# Altium PCB TWO_WHEEL.PcbDoc
Units mil, origin at the board's own origin, x right, y up, seen from the top; angles counter-clockwise.
Board outline 3115 x 2630 mil, 2 copper layers (Top Layer, Bottom Layer); 22 components, 43 nets, 150 pads, 6 vias.
Unrouted connection lines stored in the file: 1.
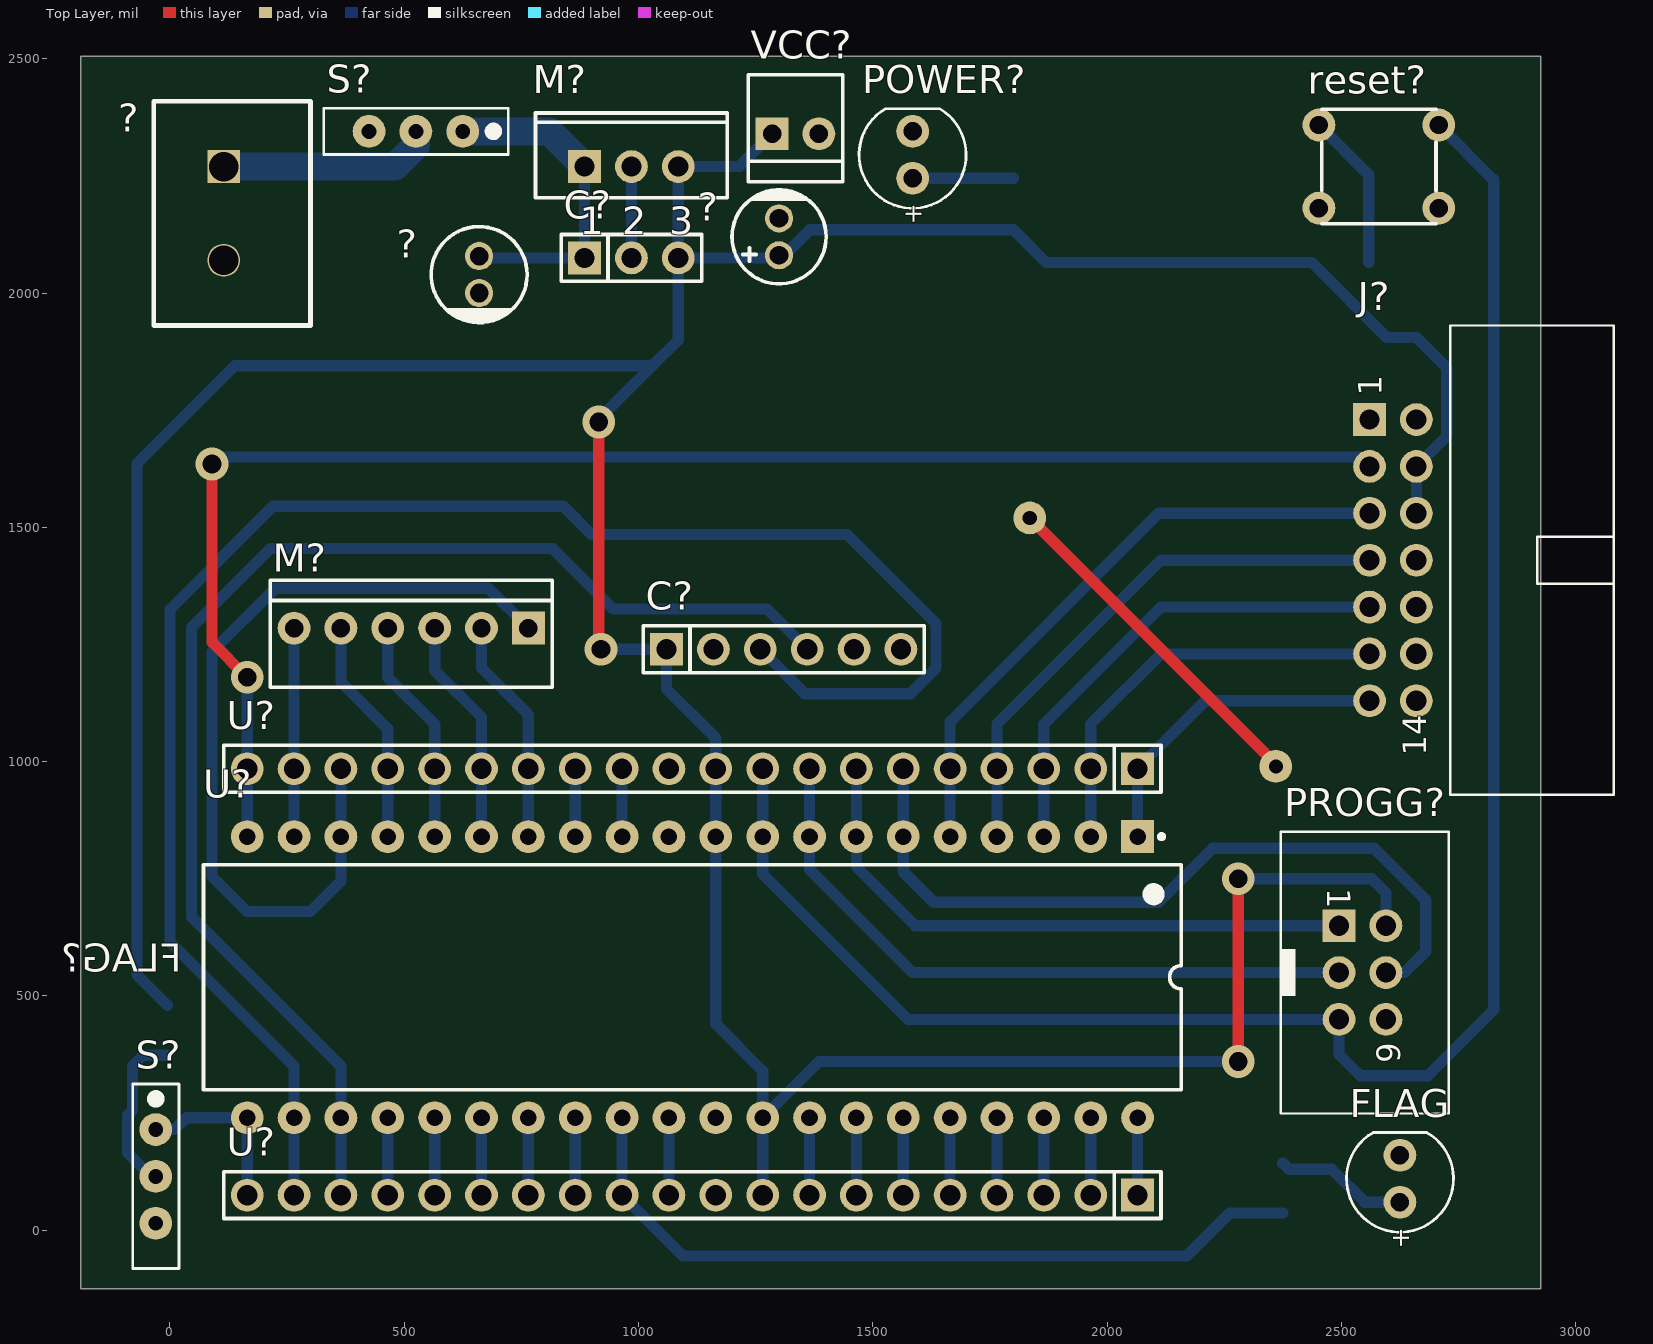
[diagram p0: Top Layer view]
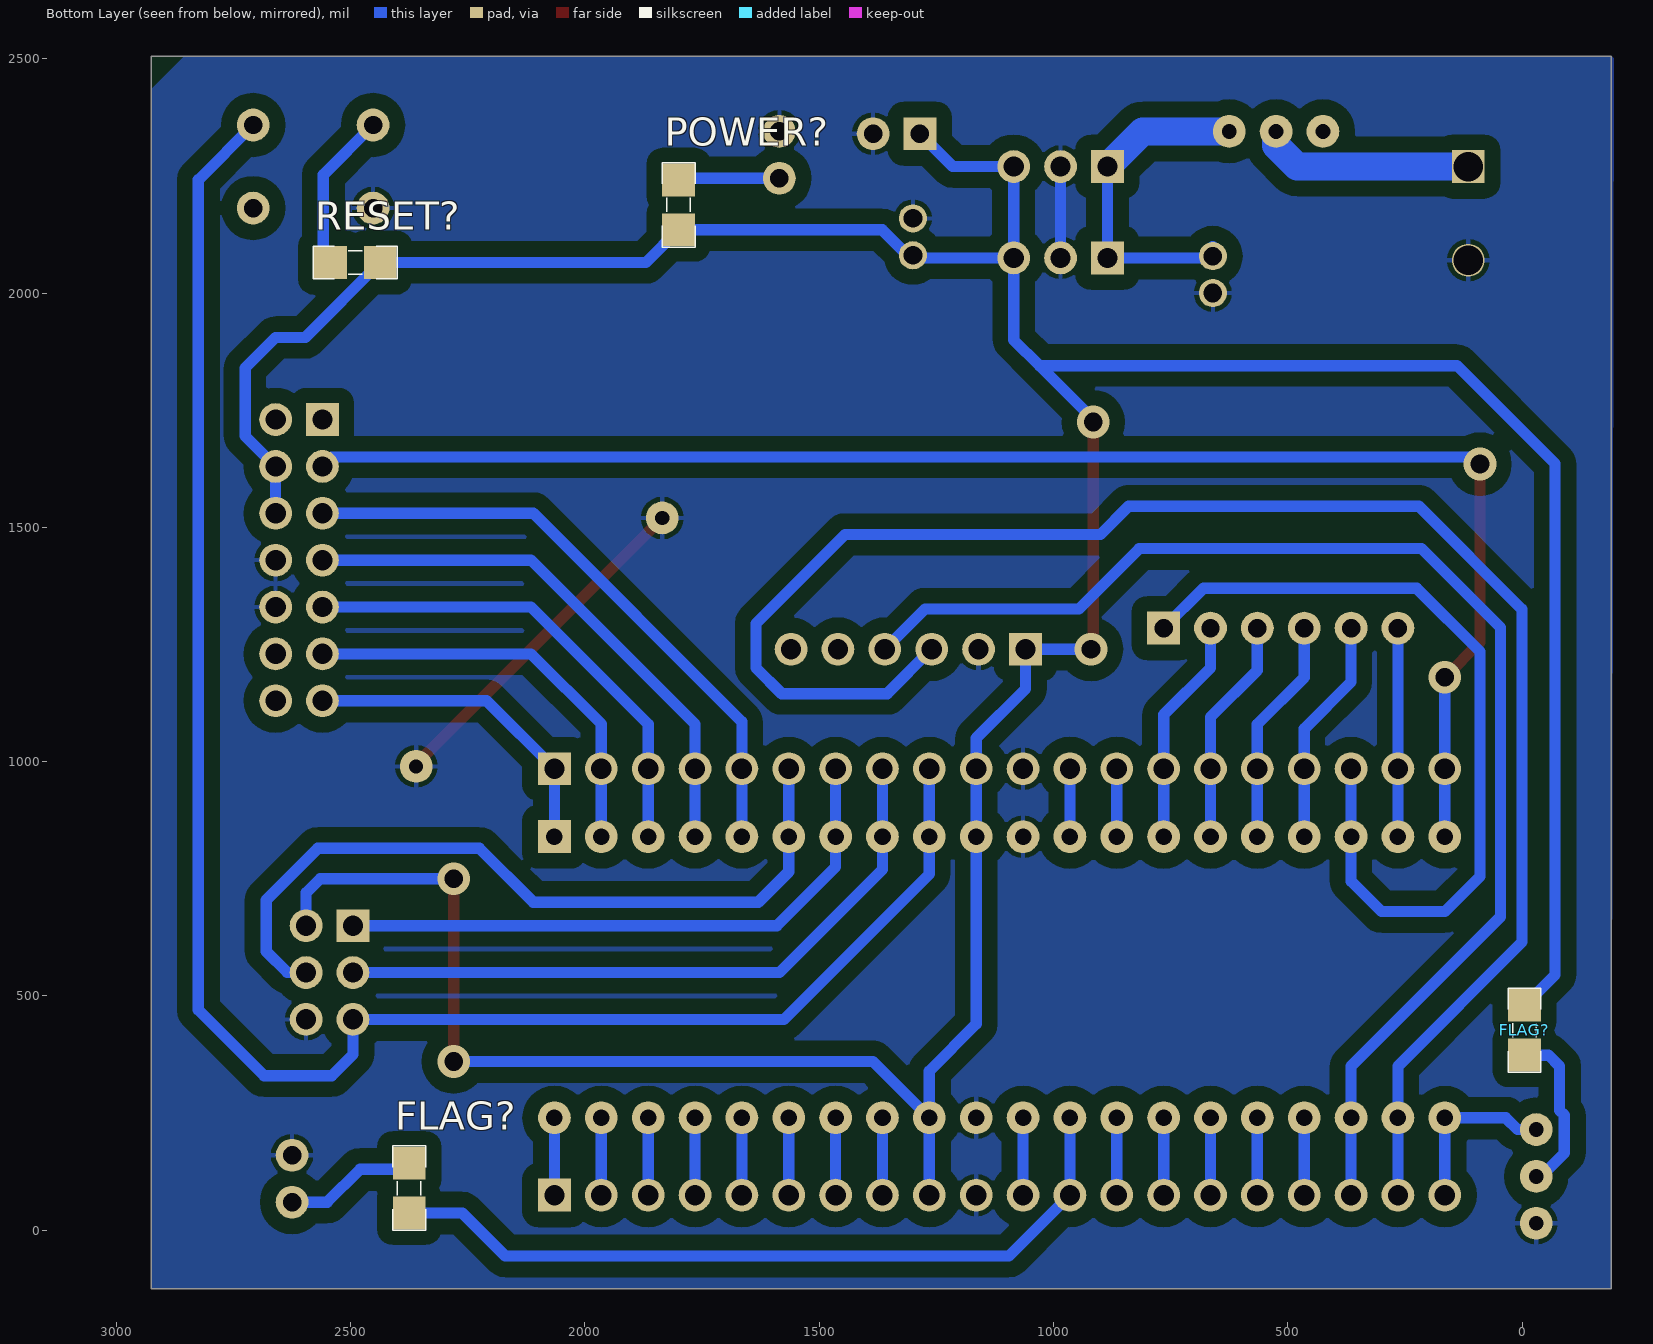
[diagram p1: Bottom Layer view, seen from below]
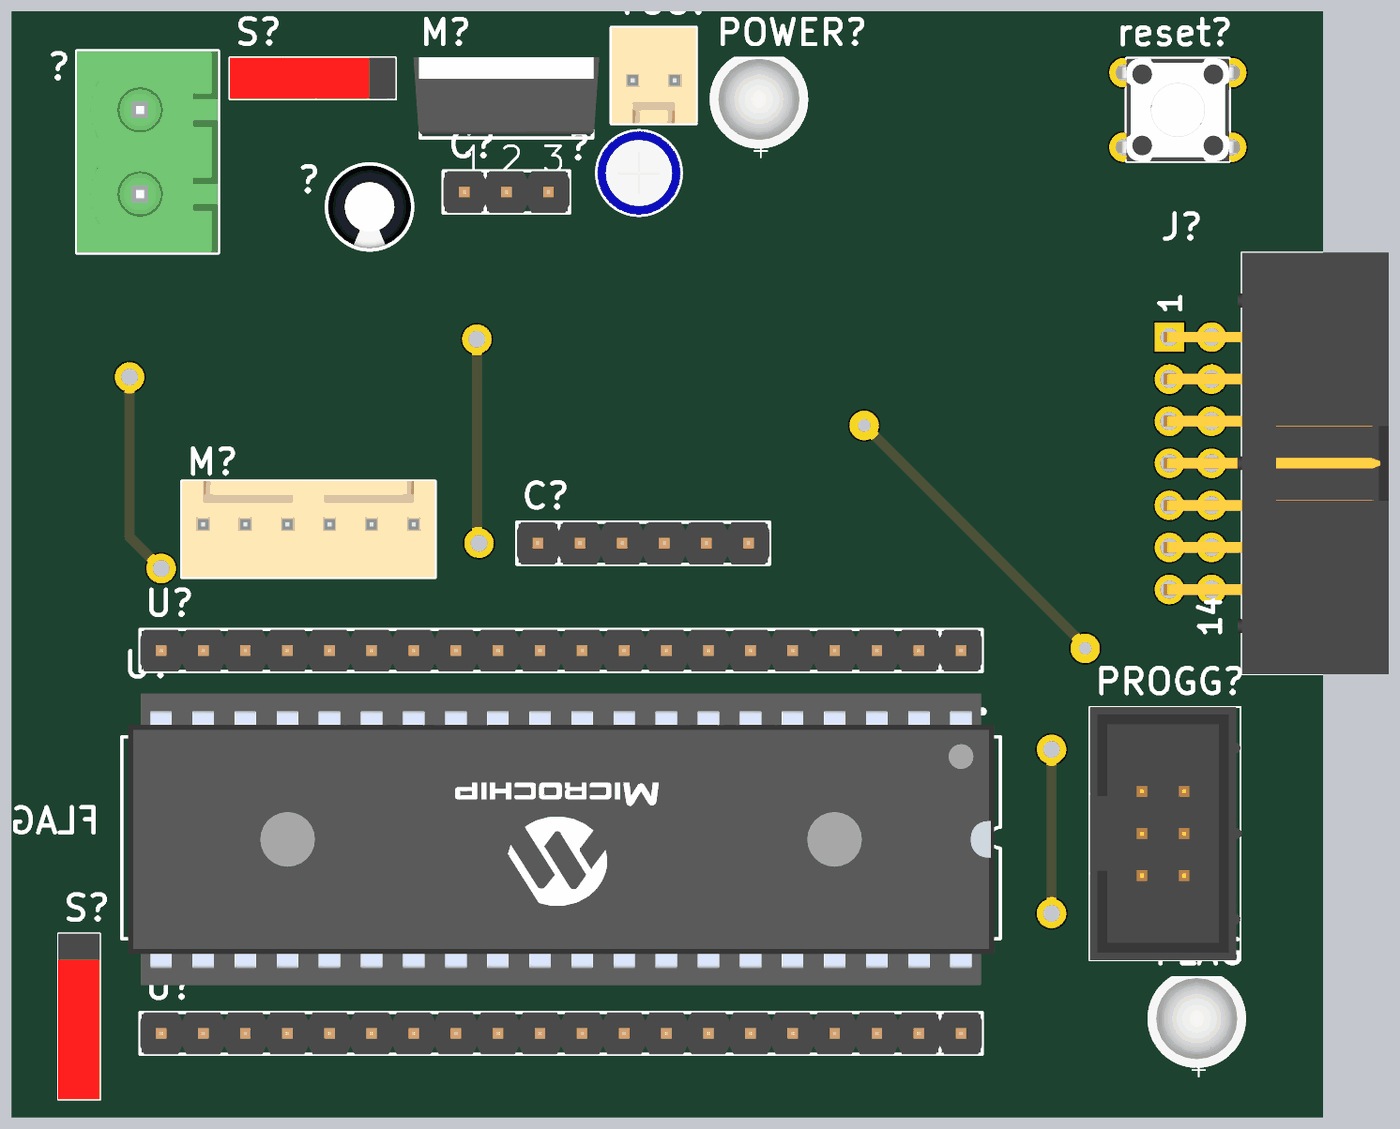
[diagram p2: 3D render of the assembled board from above, using the file's embedded part models]
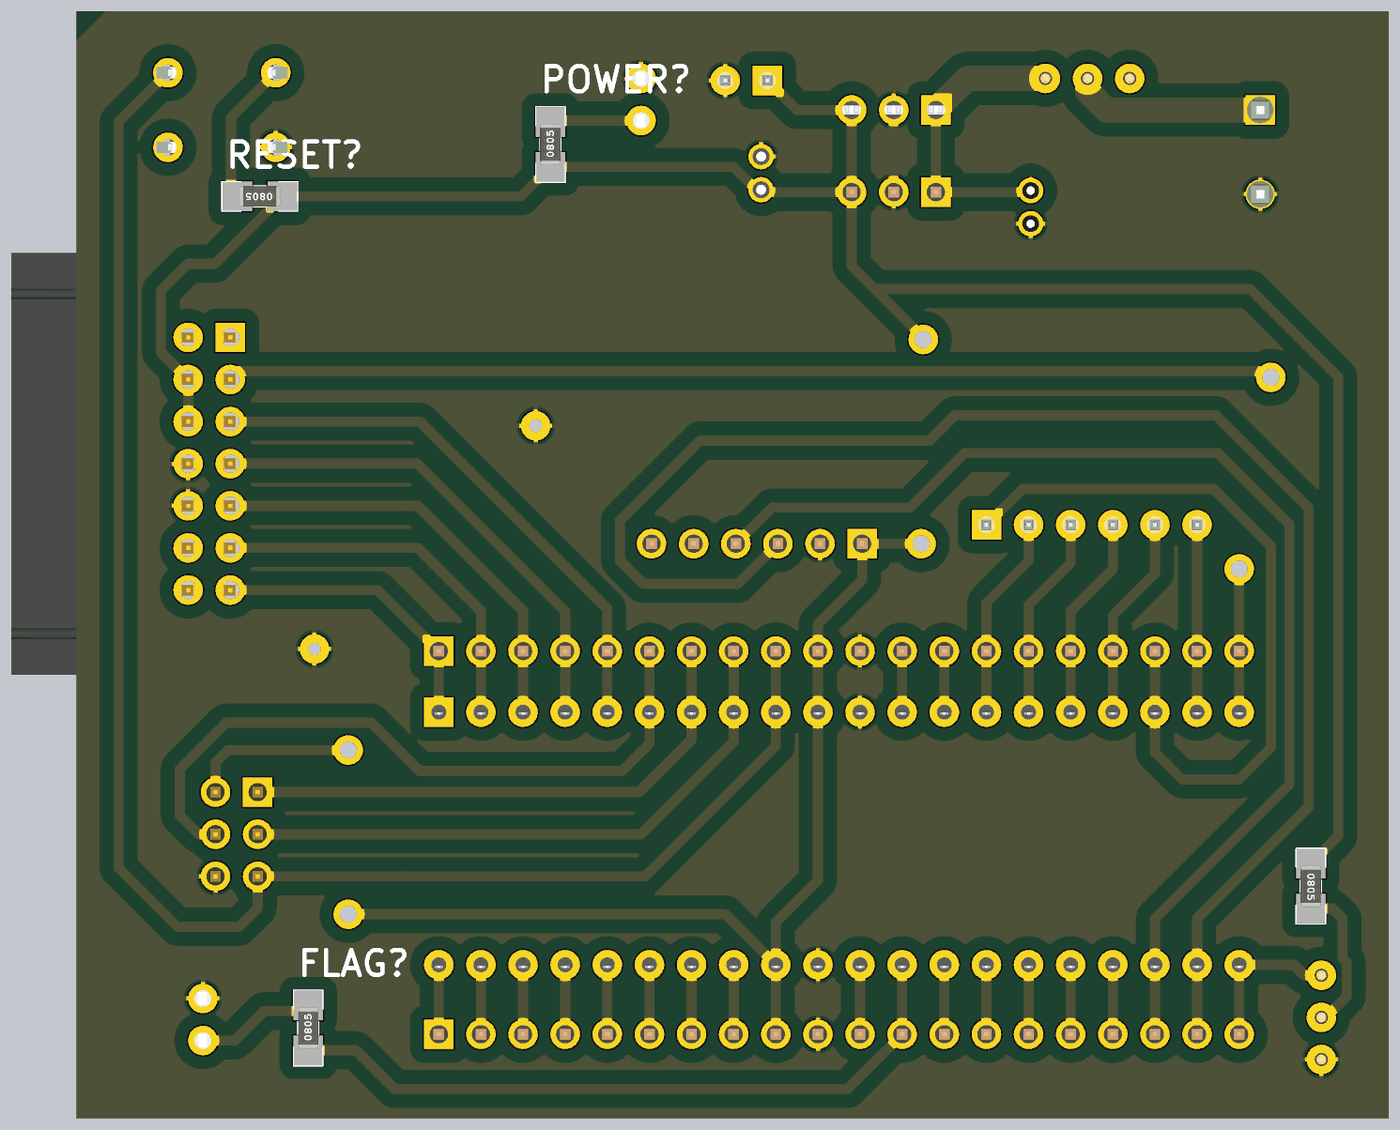
[diagram p3: 3D render of the assembled board from below, using the file's embedded part models]

## Layer stack, top to bottom
Top Solder: solder mask 0.4, Solder Resist, Dk 3.5
Top Layer: signal copper 1.4
Dielectric 1: dielectric 12.6, FR-4, Dk 4.8
Bottom Layer: signal copper 1.4
Bottom Solder: solder mask 0.4, Solder Resist, Dk 3.5

## Board outline
-190,-125 2925,-125 2925,2505 -190,2505

## Design rules (kind name [scope] priority, off if disabled: settings)
Clearance [All] p1: gap=10 ignorepadtopadclearanceinfootprint=FALSE except(0: Arc-Hole Track-Hole SMDPad-Hole THPad-Hole Via-Hole Fill-Hole Poly-Hole Region-Hole Text-Hole; 33: Arc-Fill Arc-Poly Arc-Region Track-Fill Track-Poly Track-Region SMDPad-Fill SMDPad-Poly SMDPad-Region THPad-Fill THPad-Poly THPad-Region Via-Fill Via-Poly Via-Region Fill-Fill Fill-Poly Fill-Region Poly-Poly Poly-Region Region-Region)
PolygonConnect [All] p1: connectstyle=Relief reliefconductorwidth=10 reliefentries=4 polygonreliefangle="90 Angle" airgapwidth=10
RoutingVias [All] p1: holewidth=28 width=50 viastyle="Through Hole" minholewidth=28 minwidth=50 maxholewidth=28 maxwidth=50
SolderMaskExpansion [All] p1: expansion=4
Width [All] p1: maxlimit=60 minlimit=16 preferedwidth=24
30 further rules are at their usual default settings.

## Classes and differential pairs
component class two_wheel_balance: ? C? FLAG FLAG? J? M? POWER? PROGG? reset? RESET? S? U? VCC?

## Components (designator, comment, footprint, x,y, rotation, side; value= is the part's Value field where it differs from the comment)
? "1uF" "cap 01" 1300,2120 r270 top
? "Capacitor_Ele" cap-ele-02. 660,2039.37 r270 top value=1uF
? "" 691311500102 115,2170 r270 top
C? "WE-2.54 mm Pin Header & Jumper 61300311121" 61300311121 885,2075 r0 top
C? "WE-2.54 mm Pin Header & Jumper 61300611121" 61300611121 1060,1240 r0 top
FLAG "." "WL-TMRC_5 mm" 2625.01,109.99 r90 top
FLAG? "1K" RESC3413X04N 2375,90 r90 bottom
FLAG? "1K" RESC3413X04N -5,426.85 r270 bottom
J? "61201421721" 61201421721 2610,1430 r90 top
M? "L298n OUTPUT" 61900611121 515,1285 r0 top
M? "7805CV" TO_220. 985,2270 r0 top
POWER? "1K" RESC3413X04N 1800,2188.15 r90 bottom
POWER? "151051RS11000" "WL-TMRC_5 mm" 1585,2295 r90 top
PROGG? "61200621621" 61200621621 2545,550 r270 top
RESET? "1K" RESC3413X04N 2490,2065 r0 bottom
reset? "" 4301x60437x6_6x6x4.3 2580,2270 r0 top
S? "450301014042" 450301014042 525,2345 r0 top
S? "450301014042" 450301014042 -30,115 r90 top
U? "WE-2.54 mm Pin Header & Jumper 61302011121" 61302011121 2065,75 r180 top
U? "ATmega32-16PI" 40P6 1115,540 r270 top
U? "WE-2.54 mm Pin Header & Jumper 61302011121" 61302011121 2065,985 r180 top
VCC? "EX-PWR" 61900211121 1335,2340 r180 top

## Footprints (in the part's own frame and the unit in brackets; to place one, negate y for a bottom-side part, rotate by r counter-clockwise, add the part's x,y. Pads: shape width x height; smd on the part's side, far side on the other; paste and mask are expansions set on the pad)
40P6 [mil] "DIP, 40-Leads, Row Spacing 15.24mm, Pitch 2.54mm, Body 52.2x13.95mm"
  rect 70x70 hole 35.43: 1(-300,950)
  round 70 hole 35.43: 2(-300,850) 3(-300,750) 4(-300,650) 5(-300,550) 6(-300,450) 7(-300,350) 8(-300,250) 9(-300,150) 10(-300,50) 11(-300,-50) 12(-300,-150) 13(-300,-250) 14(-300,-350) 15(-300,-450) 16(-300,-550) 17(-300,-650) 18(-300,-750) 19(-300,-850) 20(-300,-950) 21(300,-950) 22(300,-850) 23(300,-750) 24(300,-650) 25(300,-550) 26(300,-450) 27(300,-350) 28(300,-250) 29(300,-150) 30(300,-50) 31(300,50) 32(300,150) 33(300,250) 34(300,350) 35(300,450) 36(300,550) 37(300,650) 38(300,750) 39(300,850) 40(300,950)
  silkscreen extent -305,-1043 240,1043, body extent -343,-1029 350,1029, height 311
4301x60437x6_6x6x4.3 [mm] "6x6mm Tact Switch, THT version"
  round 1.778 hole 1: 1(-3.25,2.25) 2(-3.25,-2.25) 3(3.25,2.25) 4(3.25,-2.25)
  silkscreen extent -3.1,-3.1 3.1,3.1, body extent -3.95,-3.1 3.95,3.1, height 4.35
61200621621 [mil] "6 pins, straight, gold plating"
  rect 70x70 hole 43.31: 1(-100,-50)
  round 70 hole 43.31: 2(-100,50) 3(0,-50) 4(0,50) 5(100,-50) 6(100,50)
  silkscreen extent -301,-174 301,184, body extent -301,-174 301,187, height 359
61201421721 [mil] "14 pins, right angled, gold plating"
  rect 70x70 hole 43.31: 1(300,50)
  round 70 hole 43.31: 2(300,-50) 3(200,50) 4(200,-50) 5(100,50) 6(100,-50) 7(0,50) 8(0,-50) 9(-100,50) 10(-100,-50) 11(-200,50) 12(-200,-50) 13(-300,50) 14(-300,-50)
  silkscreen extent -501,-471 501,-122, body extent -501,-471 501,63, height 359
61300311121 [mil] "3 pins, 1 row, straight, gold plating"
  rect 70x70 hole 43.31: 1(0,0)
  round 70 hole 43.31: 2(100,0) 3(200,0)
  silkscreen extent -50,-50 250,50, body extent -50,-50 250,50, height 336
61300611121 [mil] "6 pins, 1 row, straight, gold plating"
  rect 70x70 hole 43.31: 1(0,0)
  round 70 hole 43.31: 2(100,0) 3(200,0) 4(300,0) 5(400,0) 6(500,0)
  silkscreen extent -50,-50 550,50, body extent -50,-50 550,50, height 336
61302011121 [mil] "20 pins, 1 row, straight, gold plating"
  rect 70x70 hole 43.31: 1(0,0)
  round 70 hole 43.31: 2(100,0) 3(200,0) 4(300,0) 5(400,0) 6(500,0) 7(600,0) 8(700,0) 9(800,0) 10(900,0) 11(1000,0) 12(1100,0) 13(1200,0) 14(1300,0) 15(1400,0) 16(1500,0) 17(1600,0) 18(1700,0) 19(1800,0) 20(1900,0)
  silkscreen extent -50,-50 1950,50, body extent -50,-50 1950,50, height 336
61900211121 [mil] "2.54mm Male Locking Header, 2p"
  rect 70x70 hole 39.37: 1(50,0)
  round 70 hole 39.37: 2(-50,0)
  silkscreen extent -101,-126 101,102, body extent -100,-126 100,102, height 455
61900611121 [mil] "2.54mm Male Locking Header, 6p"
  rect 70x70 hole 39.37: 1(250,0)
  round 70 hole 39.37: 2(150,0) 3(50,0) 4(-50,0) 5(-150,0) 6(-250,0)
  silkscreen extent -301,-126 301,102, body extent -300,-126 300,102, height 455
450301014042 [mil] "10mm*2.5mm. SPDT, ON-ON, 2.54mm, horizontal type, THT, bulk"
  round 70 hole 31.5: 1(0,0) 2(-100,0) 3(100,0)
  silkscreen extent -197,-49 197,49, body extent -197,-49 197,49, height 254
691311500102 [mil] "5,08mm - PCB Headers - Vertical - Closed ends -02p"
  rect 70x70 hole 62.99: 1(-100,0)
  round 70 hole 62.99: 2(100,0)
  silkscreen extent -239,-150 239,185, body extent -239,-150 239,185, height 473
"cap 01" [mil]
  round 60 hole 40: 1(39.37,0) 2(-39.37,0)
  silkscreen extent -100,-100 100,100, body extent -99,-99 99,99, height 494
cap-ele-02. [mil]
  round 60 hole 40: 1(-39.37,0) 2(39.37,0)
  silkscreen extent -102,-102 102,102, body extent -98,-98 98,98, height 286
RESC3413X04N [mil] "Chip Resistor, 2-Leads, Body 3/40x1/30mm, IPC Medium Density-Design:Abbas Basereh"
  rect 70x70 smd: 1(-53.15,0) 2(53.15,0)
  silkscreen extent -90,-35 90,35, body extent -49,-25 49,25, height 31
TO_220. [mil]
  rect 70x70 hole 43.31: 1(-100,0)
  round 70 hole 43.31: 2(0,0) 3(100,0)
  silkscreen extent -205,-67 205,114, body extent -221,-59 221,126, height 840
"WL-TMRC_5 mm" [mil] "THT Mono-color Round Color LED"
  round 70 hole 39.37: 1(50.01,0.01) 2(-49.99,0.01)
  silkscreen extent -114,-114 99,114, body extent -116,-116 96,116, height 362

## Part data
?: library part Cap-Polar, "Polar Capacitor", Voltage=16V, Adding Date=1387/12/20, Designer="Saeid Jorablo", Organazation=ControTec
?: library part Capacitor_Ele., Voltage=16v, LatestRevisionDate=17-Jul-2002, LatestRevisionNote="Re-released for DXP Platform.", Publisher="Altium Limited"
?: library part 691311500102, "WR-TBL Serie 311 - 5.08 mm Close Vertical PCB Header, 02p", ComponentLink1Description=Manufacturer, ComponentLink1URL=http://www.we-online.de, ComponentLink2Description=Datasheet, ComponentLink2URL=http://katalog.we-online.de/em/datasheet/6913115001xx.pdf, Part Number=691311500102, Pin Number=02p, Pitch="5.08 mm", Published Date="Feb. 2017", Publisher="Wurth Elektronik"
C?: "WR-PHD 2.54mm Pin Header", Manufacturer="Würth Elektronik eiSos GmbH", partNo=61300311121, ComponentLink1 Description=Manufacturer, ComponentLink1URL=http://www.we-online.com, ComponentLink2 Description=Datasheet, ComponentLink2URL=http://katalog.we-online.de/em/datasheet/6130xx11121.pdf, Created by="Karrer Zheng", Created Date="22 March 2013", NoPins=03
C?: "WR-PHD 2.54mm Pin Header", Manufacturer="Würth Elektronik eiSos GmbH", partNo=61300611121, ComponentLink1 Description=Manufacturer, ComponentLink1URL=http://www.we-online.com, ComponentLink2 Description=Datasheet, ComponentLink2URL=http://katalog.we-online.de/em/datasheet/6130xx11121.pdf, Created by="Karrer Zheng", Created Date="22 March 2013", NoPins=06
FLAG: library part 151051RS11000, "WL-TMRC THT Mono-color Round Color, 5 mm, Red", Emitting Color=Red, Forward Voltage="2.1 V", ComponentLink1Description=Manufacturer, ComponentLink1URL=http://www.we-online.de, ComponentLink2Description=Datasheet, ComponentLink2URL=http://katalog.we-online.de/led/datasheet/151051RS11000.pdf, Luminous Intensity="30 mcd", Part Number=151051RS11000, Published Date="Jan 2017", Publisher="Wurth Elektronik", Size="5 mm", Viewing Angle=60°
FLAG? FLAG? POWER? RESET?: library part "RES 0805 0.125W", "RES 0805", Data=16-12-2016, Desc.="RES SMD 0805", Designer="Abbas Basereh"
J?: "WR-BHD 2.54mm Male Angled Box Header", Manufacturer="Wurth Elektronik", ComponentLink1 Description=Manufacturer, ComponentLink1URL=http://www.we-online.com, ComponentLink2 Description=Datasheet, ComponentLink2URL=http://katalog.we-online.de/em/datasheet/6120xx21721.pdf, Created by="Baojun Chen", Created Date="March 2016", NoPins=14, partNo=61201421721
M?: library part 61900611121, "WR-WTB 2.54mm Male Locking Header, 6p", ComponentLink1Description=Manufacturer, ComponentLink1URL=http://www.we-online.de, ComponentLink2Description=Datasheet, ComponentLink2URL=http://katalog.we-online.de/em/datasheet/6190xx11121.pdf, Part Number=61900611121, Pin Number=6, Pitch="2.54 mm", Published Date="June 2017", Publisher="Wurth Elektronik"
M?: library part 7805, "7805", LatestRevisionDate=17-Jul-2002, LatestRevisionNote="Re-released for DXP Platform.", Publisher="Altium Limited"
POWER?: "WL-TMRC THT Mono-color Round Color, 5 mm, Red", Emitting Color=Red, Forward Voltage="2.1 V", ComponentLink1Description=Manufacturer, ComponentLink1URL=http://www.we-online.de, ComponentLink2Description=Datasheet, ComponentLink2URL=http://katalog.we-online.de/led/datasheet/151051RS11000.pdf, Luminous Intensity="30 mcd", Part Number=151051RS11000, Published Date="Jan 2017", Publisher="Wurth Elektronik", Size="5 mm", Viewing Angle=60°
PROGG?: "WR-BHD 2.54mm Male Box Header", Manufacturer="Wurth Elektronik", ComponentLink1 Description=Manufacturer, ComponentLink1URL=http://www.we-online.com, ComponentLink2 Description=Datasheet, ComponentLink2URL=http://katalog.we-online.de/em/datasheet/6120xx21621.pdf, Created by="Baojun Chen", Created Date="March 2016", NoPins=6, partNo=61200621621
reset?: library part 430156043736, "WS-TATV 6x6mm Tact Switch, THT version", ComponentLink1Description=Manufacturer, ComponentLink1URL=http://www.we-online.de, ComponentLink2Description=Datasheet, ComponentLink2URL=http://katalog.we-online.de/em/datasheet/4301x6xxx7x6.pdf, Life Cycle="200000 cycles", Operation Force=360g, Part Number=430156043736, Published Date="June 2017", Publisher="Wurth Elektronik", Size="6x6x4.3 mm"
S? S?: "WS-SLTV 10x2.5 mm THT", ComponentLink1Description=Manufacturer, ComponentLink1URL=http://www.we-online.de, ComponentLink2Description=Datasheet, ComponentLink2URL=http://katalog.we-online.de/em/datasheet/450301014042.pdf, Part Number=450301014042, Published Date="June 2017", Publisher="Wurth Elektronik"
U? U?: "WR-PHD 2.54mm Pin Header", Manufacturer="Würth Elektronik eiSos GmbH", partNo=61302011121, ComponentLink1 Description=Manufacturer, ComponentLink1URL=http://www.we-online.com, ComponentLink2 Description=Datasheet, ComponentLink2URL=http://katalog.we-online.de/em/datasheet/6130xx11121.pdf, Created by="Karrer Zheng", Created Date="22 March 2013", NoPins=20
U?: "8-Bit AVR Microcontroller with 32K Bytes of In-System Programmable Flash Memory", Supplier Part Number 1=ATMEGA32-16PI-ND, Code_JEDEC=MS-011-AC, ComponentLink1Description=Datasheet, ComponentLink1URL=http://www.atmel.com/dyn/resources/prod_documents/doc2503.pdf, ComponentLink2Description="Atmel.com Home", ComponentLink2URL=http://www.atmel.com, DatasheetVersion=2503C-AVR-10/02, PackageDescription="40-lead (0.600\"/15.24mm Wide) Plastic Dual Inline Package (PDIP)", PackageReference=40P6, PackageVersion=2017-1-4, Published=2017-1-4, Publisher="Abbas Basereh", Supplier 1=Digi-Key, Supplier 2=Farnell, Supplier 3=Mouser, Supplier Part Number 2=4376328, Supplier Part Number 3=556-ATMEGA32-16PI
VCC?: library part 61900211121, "WR-WTB 2.54mm Male Locking Header, 2p", ComponentLink1Description=Manufacturer, ComponentLink1URL=http://www.we-online.de, ComponentLink2Description=Datasheet, ComponentLink2URL=http://katalog.we-online.de/em/datasheet/6190xx11121.pdf, Part Number=61900211121, Pin Number=2, Pitch="2.54 mm", Published Date="June 2017", Publisher="Wurth Elektronik"

## Free pads (board coordinates)
  round 70 hole 30: 4(2360,990) 5(1835,1520)

## Via types
v1: diameter 70, hole 40, Top Layer to Bottom Layer, 6 vias

## Nets (pads, with @x,y where several pads share a name; then routed paths per layer and width w, separated by ;. In a path a pad name is that pad's centre, name@x,y a point inside that pad or via, vN(x,y) a via of type N, cw(c..) or ccw(c..) an arc to the next point about the centre after c; other vN are vias at no path point)
1: ?.1@660,2078.74 C?.1@885,2075 M?.1@885,2270 S?.3@625,2345 | length 720.9
  Bottom Layer w24: ?.1@660,2098.74 683.74,2075 885,2075 M?.1@885,2270
  Bottom Layer w60: S?.3@625,2345 810,2345 M?.1@885,2270
2: ?.2 C?.2 FLAG.1 J?.8 J?.10 M?.2@985,2270 pad.4 pad.5 POWER?.1@1584.99,2345.01 PROGG?.6 reset?.2 S?.2@-30,15 U?.10@1165,75 U?.11@1065,840 U?.11@1065,985 U?.31 VCC?.2 | length 942.5
  Top Layer w24: pad.5 2360,995 pad.4
  Bottom Layer w24: C?.2@985,2075 M?.2@985,2270
3: ?.1@1300,2080.63 C?.1@1060,1240 C?.3@1085,2075 FLAG?.1@-5,480 J?.4 J?.6 M?.3@1085,2270 POWER?.1@1800,2135 PROGG?.2 RESET?.1 U?.9@1265,75 U?.10@1165,840 U?.10@1165,985 U?.11@1065,75 U?.30 U?.32 VCC?.1 | length 9225.2
  Top Layer w24: v1(915,1725) 915,1245 v1(920,1240) ; v1(2280,360) v1(2280,750)
  Bottom Layer w24: FLAG?.1@-5,480 -70,545 -70,1635.96 139.04,1845 1030,1845 ; v1(915,1725) 915,1730 1030,1845 ; v1(920,1240) 1060,1240 1060,1155 1165,1050 1165,985 1165,840 1165,440 1265,340 U?.32 ; U?.11@1065,60 1065,75 U?.30 ; U?.9@1265,75 U?.32 ; VCC?.1 1215,2270 1085,2270 C?.3@1085,2075 ; ?.1@1290,2075 C?.3@1085,2075 ; ?.1@1310,2079.37 1365.63,2135 1800,2135 1870,2065 RESET?.1 2596.85,1905 2660,1905 2725,1840 2725,1695 J?.4 J?.6 ; v1(2280,360) 1385,360 U?.32 ; v1(2280,750) 2565,750 2595,720 PROGG?.2 ; 1030,1845 1085,1900 C?.3@1085,2075
12V: ?.1@115,2270 S?.1@525,2345 | length 458.6
  Bottom Layer w60: ?.1@115,2270 480,2270 525,2315 S?.1@525,2345
ENA: M?.1@765,1285 U?.18@365,840 U?.18@365,985 | length 1819.1
  Bottom Layer w24: U?.18@365,985 365,840 365,745 300,680 165,680 90,755 90,1235 225,1370 680,1370 M?.1@765,1285
ENB: M?.6 U?.19@265,840 U?.19@265,985 | length 445
  Bottom Layer w24: U?.19@265,840 265,985 M?.6
FLAG: FLAG?.1@2375,36.85 U?.12@965,75 U?.29 | length 1666.9
  Bottom Layer w24: U?.29 965,75 1095,-55 2170,-55 2261.85,36.85 FLAG?.1@2375,36.85
IN1: M?.2@665,1285 U?.14@765,840 U?.14@765,985 | length 486.4
  Bottom Layer w24: M?.2@665,1285 665,1200 765,1100 765,985 U?.14@765,840
IN2: M?.3@565,1285 U?.15@665,840 U?.15@665,985 | length 486.4
  Bottom Layer w24: M?.3@565,1285 565,1195 665,1095 665,985 U?.15@665,840
IN3: M?.4 U?.16@565,840 U?.16@565,985 | length 486.4
  Bottom Layer w24: M?.4 465,1180 565,1080 565,985 U?.16@565,840
IN4: M?.5 U?.17@465,840 U?.17@465,985 | length 486.4
  Bottom Layer w24: M?.5 365,1170 465,1070 465,985 U?.17@465,840
MISO: PROGG?.1 U?.7@1465,840 U?.7@1465,985 | length 1291.8
  Bottom Layer w24: U?.7@1465,985 1465,840 1465,775 1590,650 PROGG?.1
MOSI: PROGG?.4 U?.6@1565,840 U?.6@1565,985 | length 1668.8
  Bottom Layer w24: U?.6@1565,985 1565,840 1565,765 1630,700 2110,700 2225,815 2570,815 2680,705 2680,595 2635,550 PROGG?.4
NetFLAG?_2: FLAG?.2@-5,373.7 S?.1@-30,115 | length 344.7
  Bottom Layer w24: S?.1@-40,115 -90,165 -90,245.61 -80,255.61 -80,350 -56.3,373.7 FLAG?.2@-5,373.7
NetFLAG_2: FLAG.2 FLAG?.2@2375,143.15 | length 284.4
  Bottom Layer w24: FLAG?.2@2375,143.15 2388.15,130 2480,130 2550,60 FLAG.2
NetPOWER?_2: POWER?.2 | length 215
  Bottom Layer w24: POWER?.2@1584.99,2245.01 POWER?.2@1799.99,2245.01
Netreset?_1: reset?.1 RESET?.2 | length 337.5
  Bottom Layer w24: reset?.1 2558.15,2252.48 RESET?.2@2558.15,2065
PA0: U?.1@2065,75 U?.40 | length 165
  Bottom Layer w24: U?.1@2065,75 U?.40
PA1: U?.2@1965,75 U?.39 | length 165
  Bottom Layer w24: U?.2@1965,75 U?.39
PA2: U?.3@1865,75 U?.38 | length 165
  Bottom Layer w24: U?.3@1865,75 U?.38
PA3: U?.4@1765,75 U?.37 | length 165
  Bottom Layer w24: U?.4@1765,75 U?.37
PA4: U?.5@1665,75 U?.36 | length 165
  Bottom Layer w24: U?.5@1665,75 U?.36
PA5: U?.6@1565,75 U?.35 | length 165
  Bottom Layer w24: U?.6@1565,75 U?.35
PA6: U?.7@1465,75 U?.34 | length 165
  Bottom Layer w24: U?.7@1465,75 U?.34
PA7: U?.8@1365,75 U?.33 | length 165
  Bottom Layer w24: U?.8@1365,75 U?.33
PB0: J?.13 U?.1@2065,840 U?.1@2065,985 | length 700.1
  Bottom Layer w24: U?.1@2065,840 2065,985 2210,1130 J?.13
PB1: J?.11 U?.2@1965,840 U?.2@1965,985 | length 897.1
  Bottom Layer w24: U?.2@1965,840 1965,985 1965,1080 2115,1230 J?.11
PB2: J?.9 U?.3@1865,840 U?.3@1865,985 | length 1038.6
  Bottom Layer w24: U?.3@1865,840 1865,985 1865,1080 2115,1330 J?.9
PB3: J?.7 U?.4@1765,840 U?.4@1765,985 | length 1180
  Bottom Layer w24: U?.4@1765,840 1765,985 1765,1080 2115,1430 J?.7
PB4: J?.5 U?.5@1665,840 U?.5@1665,985 | length 1324.3
  Bottom Layer w24: U?.5@1665,840 1665,985 1665,1085 2110,1530 J?.5
PB7: PROGG?.3 U?.8@1365,840 U?.8@1365,985 | length 1436.1
  Bottom Layer w24: U?.8@1365,985 1365,840 1365,770 1585,550 PROGG?.3
PC0: C?.3@1260,1240 U?.19@265,75 U?.22 | length 3721.6
  Bottom Layer w24: U?.19@265,75 U?.22 265,350 0,615 0,1325 220,1545 840,1545 900,1485 1445,1485 1635,1295 1635,1200 1580,1145 1355,1145 C?.3@1260,1240
PC1: C?.4 U?.18@365,75 U?.23 | length 2816.2
  Bottom Layer w24: U?.18@365,75 U?.23 365,350 46,669 46,1286 215,1455 816.92,1455 945.92,1326 1274,1326 C?.4
PC2: U?.17@465,75 U?.24 | length 165
  Bottom Layer w24: U?.17@465,75 U?.24
PC3: U?.16@565,75 U?.25 | length 165
  Bottom Layer w24: U?.16@565,75 U?.25
PC4: U?.15@665,75 U?.26 | length 165
  Bottom Layer w24: U?.15@665,75 U?.26
PC5: U?.14@765,75 U?.27 | length 165
  Bottom Layer w24: U?.14@765,75 U?.27
PC6: U?.13@865,75 U?.28 | length 165
  Bottom Layer w24: U?.13@865,75 U?.28
PD6: J?.3 U?.20@165,840 U?.20@165,985 | length 3310.6
  Top Layer w24: v1(90,1635) 90,1255 v1(165,1180)
  Bottom Layer w24: v1(90,1635) 105,1650 2540,1650 J?.3 ; U?.20@165,840 165,985 v1(165,1180)
PD7: S?.3@-30,215 U?.20@165,75 U?.21 | length 380.4
  Bottom Layer w24: S?.3@-40,215 -30,215 10,215 35,240 U?.21 U?.20@165,75
RESET: PROGG?.5 reset?.3 U?.9@1265,840 U?.9@1265,985 | length 4002.1
  Bottom Layer w24: U?.9@1265,985 1265,840 1265,760 1575,450 PROGG?.5 2495,375 2540,330 2685,330 2825,470 2825,2241.54 reset?.3
XTAL1: U?.12@965,840 U?.12@965,985 | length 145
  Bottom Layer w24: U?.12@965,840 U?.12@965,985
XTAL2: U?.13@865,840 U?.13@865,985 | length 145
  Bottom Layer w24: U?.13@865,840 U?.13@865,985
pads on no net: C?.5 C?.6 J?.1 J?.2 J?.12 J?.14 reset?.4 S?.2@425,2345

## Polygon pours and split planes (outlines as drawn)
2 on Bottom Layer "Bottom Layer-No Net" (solid, pour order 2): -195.21,2505 2855,2505 2925,2435 2925,-125 -190,-125

## Text inside footprints (layer, text, board x,y; h text height)
FLAG: Top Overlay "+" at 2644.68,-39.61 h39.37 r90
J?: Top Overlay "14" at 2680.87,1012.68 h50 r90; Top Overlay "1" at 2586.38,1780.39 h50 r90
M?: Top Overlay "1" at 875.16,2125.31 h59.06; Top Overlay "3" at 1065.32,2125.32 h59.06; Top Overlay "2" at 965.31,2125.32 h59.06
POWER?: Top Overlay "+" at 1604.68,2145.4 h39.37 r90
PROGG?: Top Overlay "6" at 2575,400 h50 r270; Top Overlay "1" at 2470,730 h50 r270